# Altium PCB Nixie_clocks_Main_board.PcbDoc
Units mm, origin at the board's own origin, x right, y up, seen from the top; angles counter-clockwise.
Board outline 50 x 100 mm, 2 copper layers (Top Layer, Bottom Layer), stack 1.671 mm thick; 166 components, 129 nets, 456 pads, 71 vias.
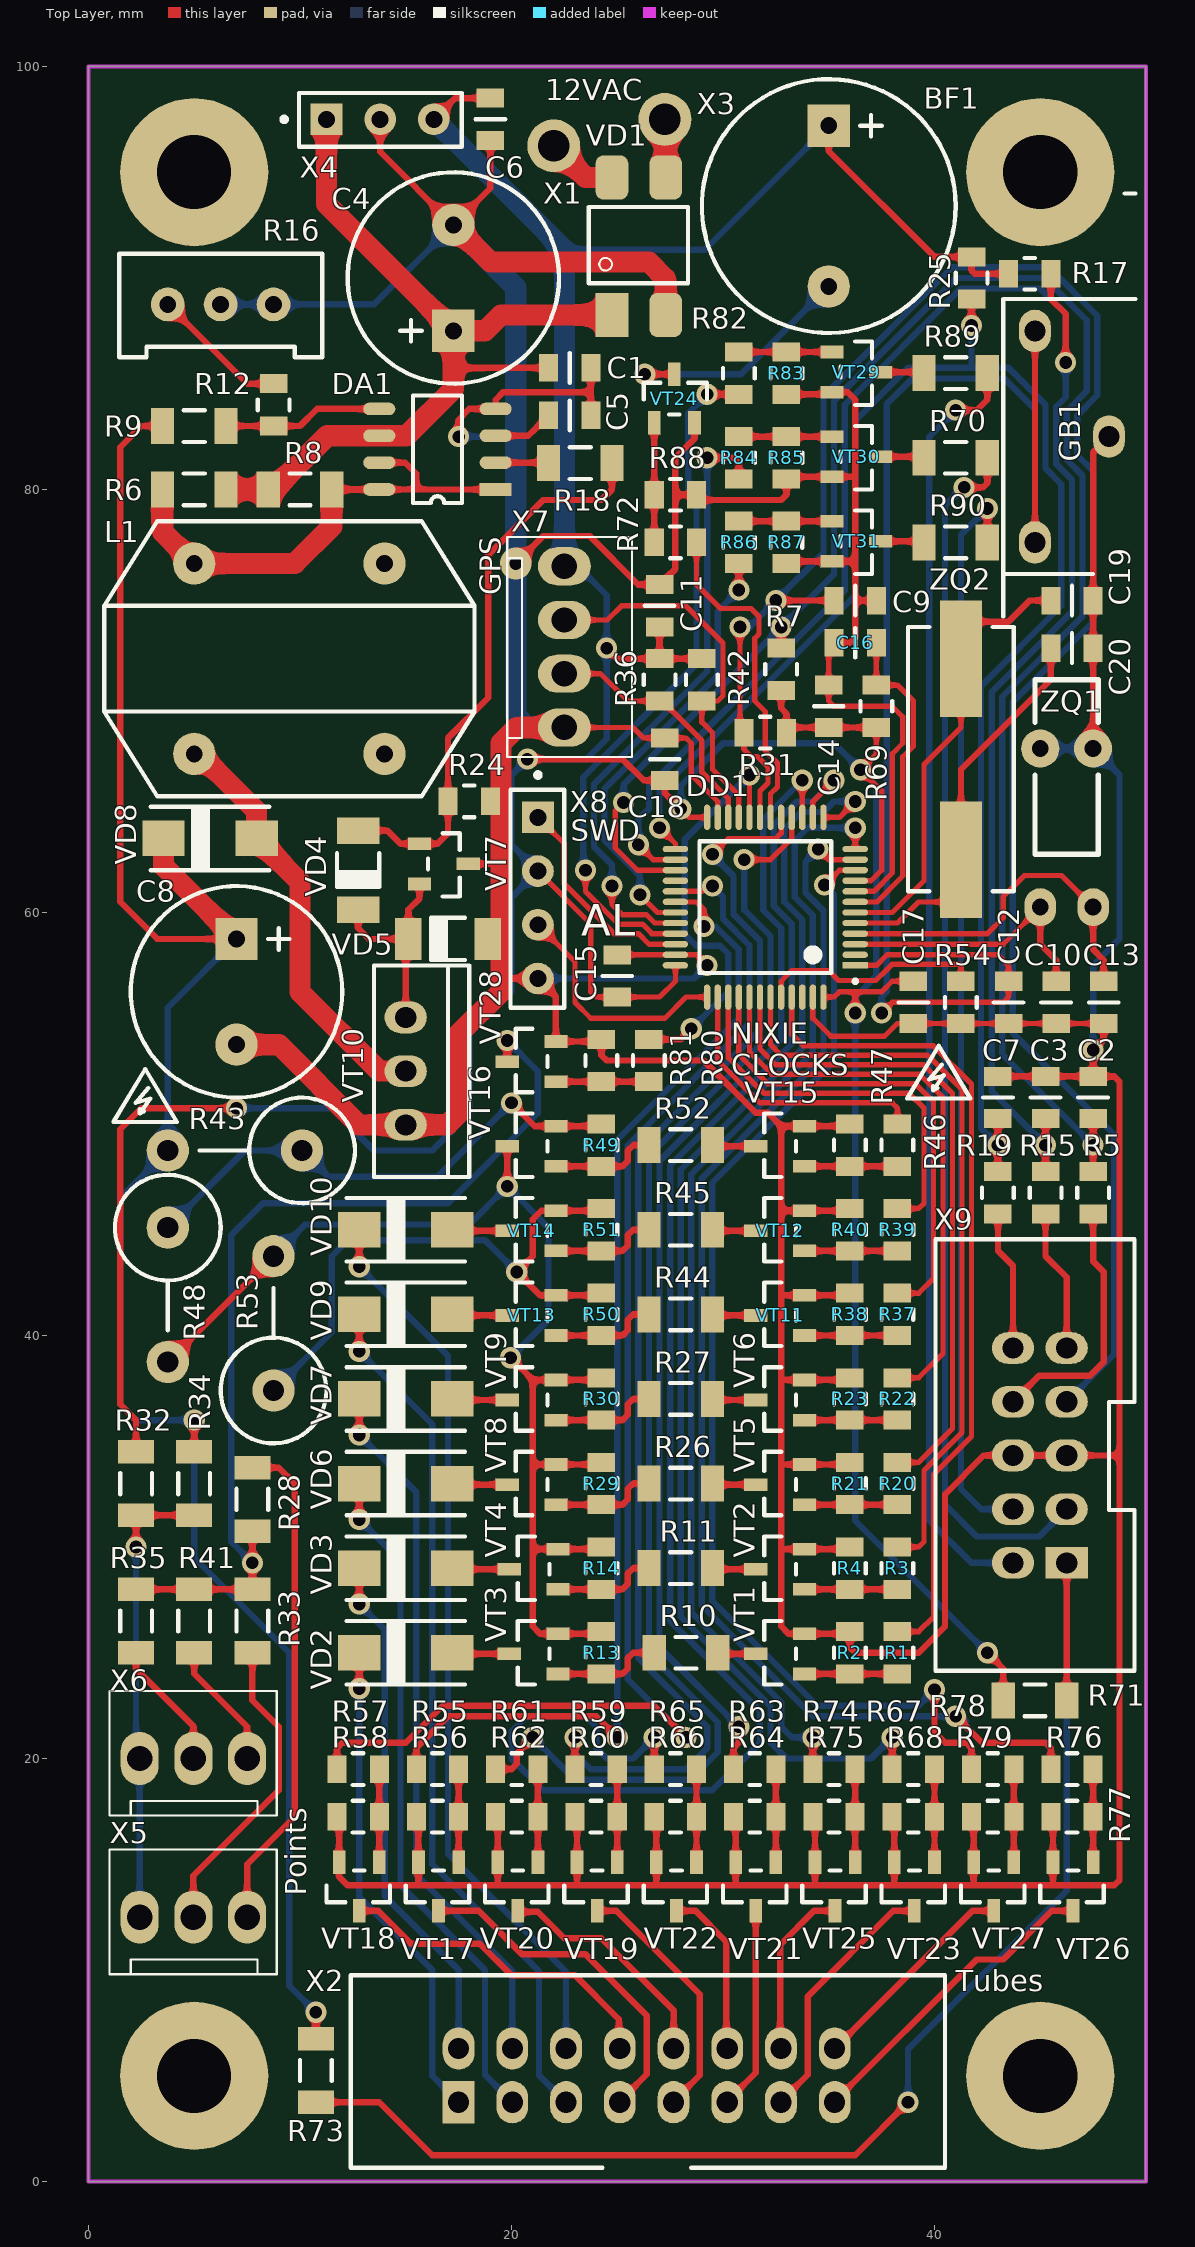
[diagram p0: Top Layer view]
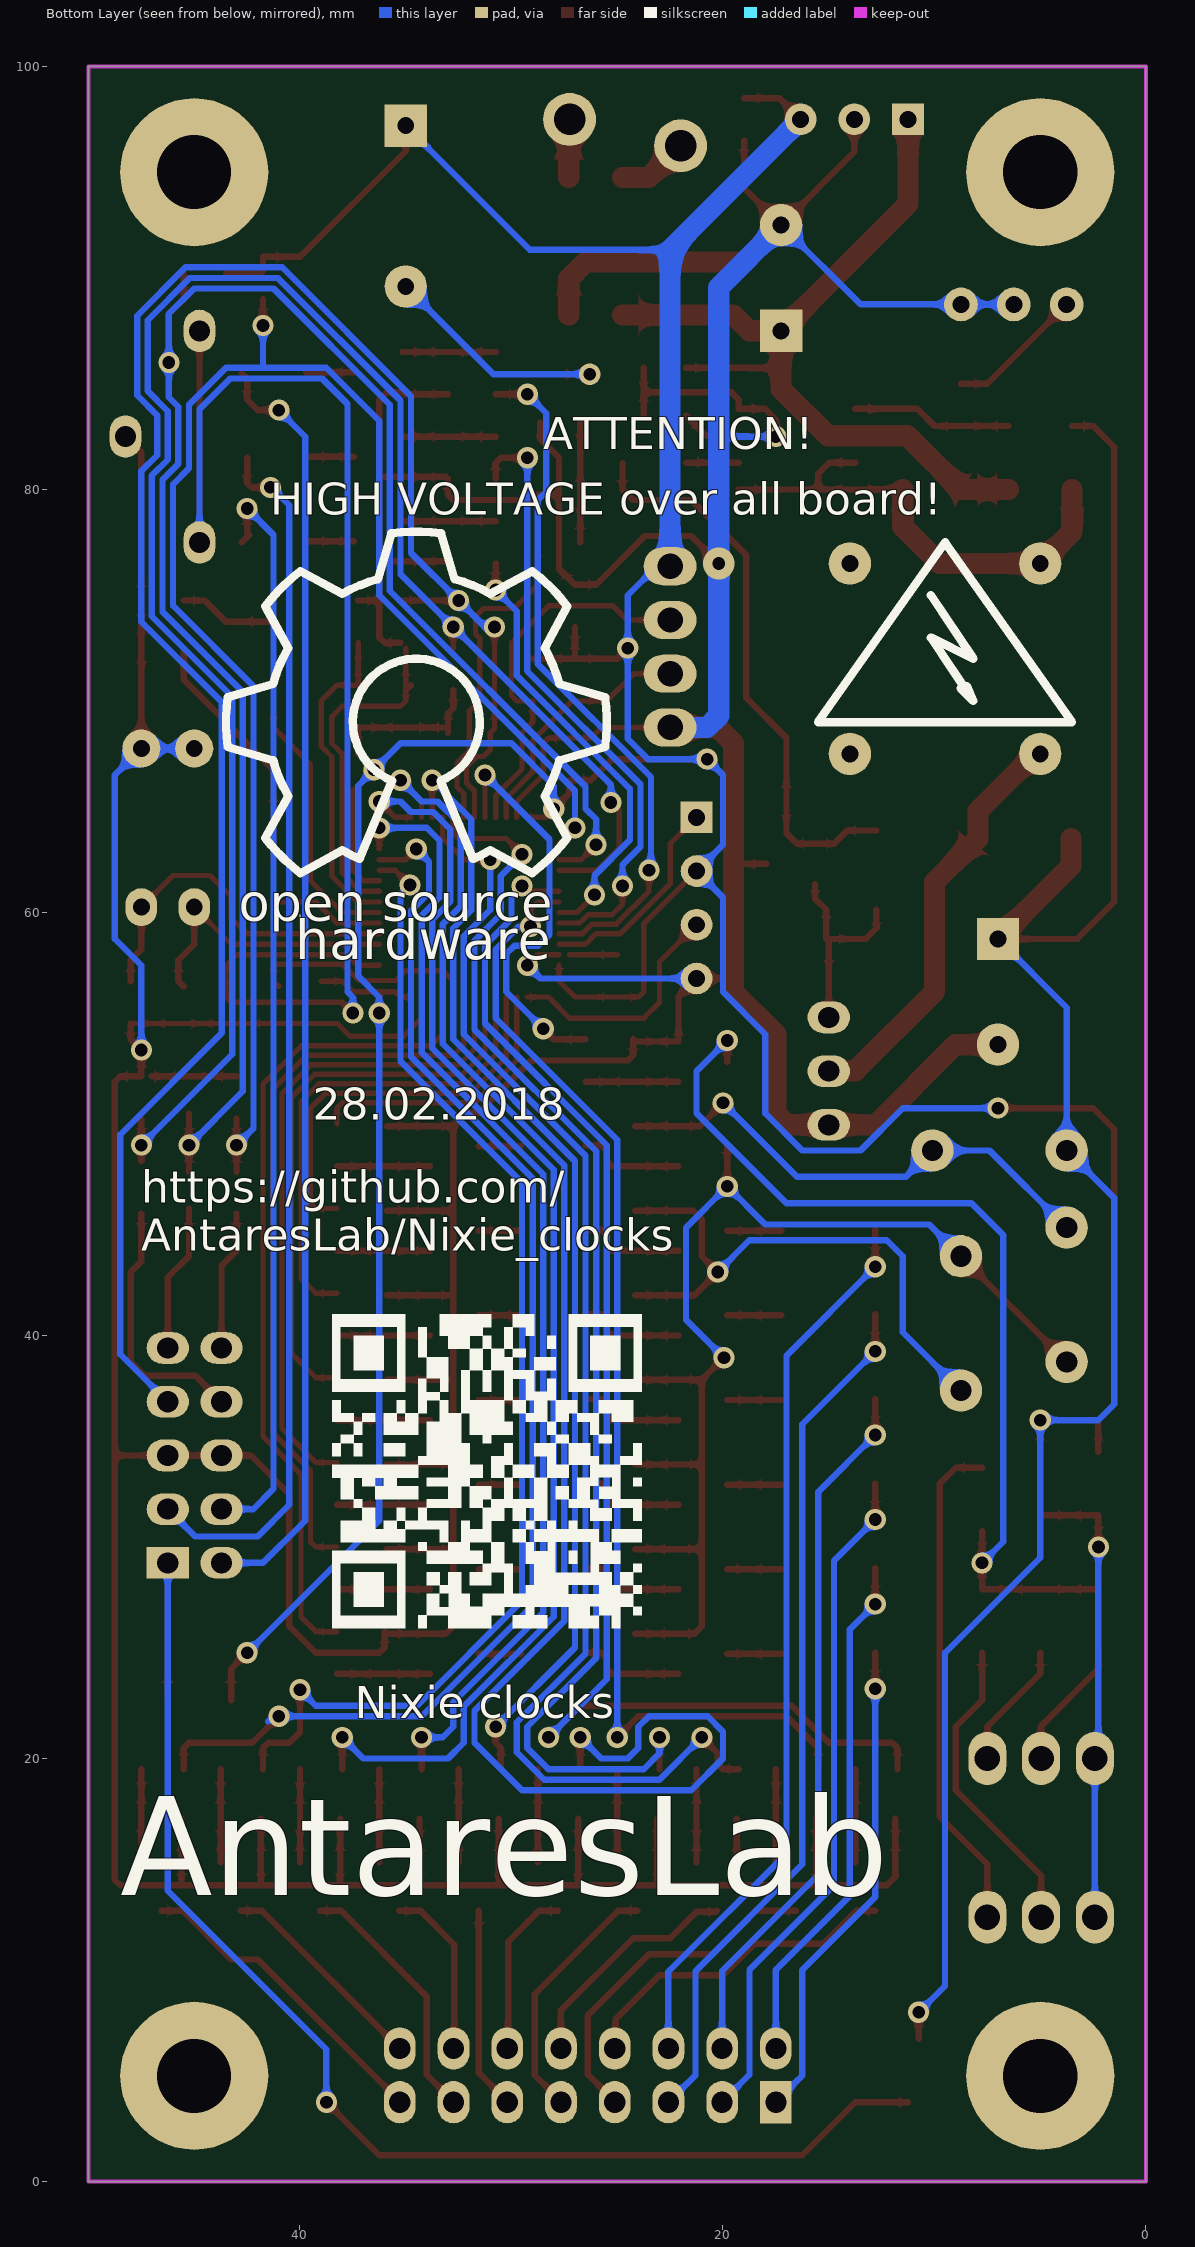
[diagram p1: Bottom Layer view, seen from below]

## Layer stack, top to bottom
Top Solder: solder mask 0.0102, Solder Resist, Dk 3.5
Top Layer: signal copper 0.0356
Dielectric 1: dielectric 1.6, FR-4, Dk 4.8
Bottom Layer: signal copper 0.0356
Bottom Solder: solder mask 0.0102, Solder Resist, Dk 3.5

## Board outline
0,0 50,0 50,100 0,100

## Design rules (kind name [scope] priority, off if disabled: settings)
Clearance [All] p1: gap=0.25 ignorepadtopadclearanceinfootprint=FALSE except(0: Arc-Hole Track-Hole SMDPad-Hole THPad-Hole Via-Hole Fill-Hole Poly-Hole Region-Hole Text-Hole; 0.2: Arc-Arc Arc-Track Arc-SMDPad Track-Track Track-SMDPad SMDPad-SMDPad)
PolygonConnect [All] p1: connectstyle=Relief reliefconductorwidth=0.254 reliefentries=4 polygonreliefangle="90 Angle" airgapwidth=0.254
RoutingVias [All] p1: holewidth=0.711 width=1.27 viastyle="Through Hole" minholewidth=0.711 minwidth=1.27 maxholewidth=0.711 maxwidth=1.27
SolderMaskExpansion [All] p1: expansion=0.102
Width [All] p1: maxlimit=5 minlimit=0.2 preferedwidth=0.254
30 further rules are at their usual default settings.

## Components (designator, comment, footprint, x,y, rotation, side; value= is the part's Value field where it differs from the comment)
BF1 "BMT-12xx" BMT-12xx 35,97.2 r270 top
C1 "100nF" C0805 22.75,85.75 r180 top
C2 "100nF" C0805 47.5,51.25 r270 top
C3 "100nF" C0805 45.25,51.25 r270 top
C4 "1000uF" "CapEl 10x20x5" 17.25,87.5 r90 top
C5 "1nF" C0805 22.75,83.5 r180 top
C6 "100nF" C0805 19,97.5 r90 top
C7 "100nF" C0805 43,51.25 r270 top
C8 "4.7uF" "CapEl 10x20x5" 7,58.75 r270 top
C9 "100nF" C0805 36.25,74.75 r180 top
C10 "22pF" C0805 45.75,55.75 r90 top
C11 "100nF" C0805 27,74.5 r270 top
C12 "100nF" C0805 43.5,55.75 r90 top
C13 "22pF" C0805 48,55.75 r90 top
C14 "100nF" C0805 35,69.75 r270 top
C15 "100nF" C0805 25,57 r270 top
C16 "100nF" C0805 36.25,72.75 r0 top
C17 "100nF" C0805 39,55.75 r90 top
C18 "100nF" C0805 27.25,67.25 r270 top
C19 "22pF" C0805 46.5,74.75 r180 top
C20 "22pF" C0805 46.5,72.5 r180 top
DA1 "MC34063ADG" SO8 19.25,80 r180 top
DD1 "STM32F103CBT6" LQFP48 36.25,57.5 r180 top
L1 "1mH" "CESL inductor" 9.5,72 r0 top
R1 "2.2k" R0805 38.25,25 r270 top
R2 "2.2k" R0805 36,25 r270 top
R3 "2.2k" R0805 38.25,29 r270 top
R4 "2.2k" R0805 36,29 r270 top
R5 "1k" R0805 47.5,46.75 r90 top
R6 "1.5" R1206 5,80 r180 top
R7 "10k" R0805 32.75,71.5 r270 top
R8 "1.5" R1206 10,80 r0 top
R9 "220k" R1206 5,83 r0 top
R10 "470k" R1206 28.25,25 r180 top
R11 "470k" R1206 28,29 r180 top
R12 "1k" R0805 8.75,84 r90 top
R13 "4.7k" R0805 24.25,25 r90 top
R14 "4.7k" R0805 24.25,29 r90 top
R15 "1k" R0805 45.25,46.75 r90 top
R16 "1k" 3296W 3.75,88.75 r0 top
R17 "10k" R0805 44.5,90.2 r180 top
R18 "10" R1206 23.25,81.25 r0 top
R19 "1k" R0805 43,46.75 r90 top
R20 "2.2k" R0805 38.25,33 r270 top
R21 "2.2k" R0805 36,33 r270 top
R22 "2.2k" R0805 38.25,37 r270 top
R23 "2.2k" R0805 36,37 r270 top
R24 "1k" R0805 18,65.25 r180 top
R25 "10k" R0805 41.75,90 r90 top
R26 "470k" R1206 28,33 r180 top
R27 "470k" R1206 28,37 r180 top
R28 "220k" R1206 7.75,32.25 r90 top
R29 "4.7k" R0805 24.25,33 r90 top
R30 "4.7k" R0805 24.25,37 r90 top
R31 "10k" R0805 32,68.5 r0 top
R32 "0R" R1206 2.25,33 r90 top
R33 "220k" R1206 7.75,26.5 r270 top
R34 "0R" R1206 5,33 r90 top
R35 "220k" R1206 2.25,26.5 r270 top
R36 "10k" R0805 27,71 r90 top
R37 "2.2k" R0805 38.25,41 r270 top
R38 "2.2k" R0805 36,41 r270 top
R39 "2.2k" R0805 38.25,45 r270 top
R40 "2.2k" R0805 36,45 r270 top
R41 "220k" R1206 5,26.5 r270 top
R42 "10k" R0805 29,71 r90 top
R43 "4.7k" "MF-1W Vertical" 3.75,48.75 r0 top
R44 "470k" R1206 28,41 r180 top
R45 "470k" R1206 28,45 r180 top
R46 "2.2k" R0805 38.25,49 r270 top
R47 "2.2k" R0805 36,49 r270 top
R48 "12k" "MF-1W Vertical" 3.75,38.75 r90 top
R49 "4.7k" R0805 24.25,49 r270 top
R50 "4.7k" R0805 24.25,41 r90 top
R51 "4.7k" R0805 24.25,45 r90 top
R52 "470k" R1206 28,49 r180 top
R53 "33k" "MF-1W Vertical" 8.75,43.75 r270 top
R54 "10k" R0805 41.25,55.75 r90 top
R55 "2.2k" R0805 16.5,19.5 r0 top
R56 "2.2k" R0805 16.5,17.25 r0 top
R57 "2.2k" R0805 12.75,19.5 r0 top
R58 "2.2k" R0805 12.75,17.25 r0 top
R59 "2.2k" R0805 24,19.5 r0 top
R60 "2.2k" R0805 24,17.25 r0 top
R61 "2.2k" R0805 20.25,19.5 r0 top
R62 "2.2k" R0805 20.25,17.25 r0 top
R63 "2.2k" R0805 31.5,19.5 r0 top
R64 "2.2k" R0805 31.5,17.25 r0 top
R65 "2.2k" R0805 27.75,19.5 r0 top
R66 "2.2k" R0805 27.75,17.25 r0 top
R67 "2.2k" R0805 39,19.5 r0 top
R68 "2.2k" R0805 39,17.25 r0 top
R69 "10k" R0805 37.25,69.75 r90 top
R70 "220k" R1206 41,81.5 r180 top
R71 "0R" R1206 44.75,22.75 r180 top
R72 "2.2k" R0805 27.75,77.5 r180 top
R73 "0R" R1206 10.75,5.25 r90 top
R74 "2.2k" R0805 35.25,19.5 r0 top
R75 "2.2k" R0805 35.25,17.25 r0 top
R76 "2.2k" R0805 46.5,19.5 r0 top
R77 "2.2k" R0805 46.5,17.25 r0 top
R78 "2.2k" R0805 42.75,19.5 r0 top
R79 "2.2k" R0805 42.75,17.25 r0 top
R80 "2.2k" R0805 26.5,53 r270 top
R81 "2.2k" R0805 24.25,53 r270 top
R82 "2.2k" R0805 30.75,85.5 r90 top
R83 "2.2k" R0805 33,85.5 r90 top
R84 "2.2k" R0805 30.75,81.5 r90 top
R85 "2.2k" R0805 33,81.5 r90 top
R86 "2.2k" R0805 30.75,77.5 r90 top
R87 "2.2k" R0805 33,77.5 r90 top
R88 "2.2k" R0805 27.75,79.75 r180 top
R89 "220k" R1206 41,85.5 r180 top
R90 "220k" R1206 41,77.5 r180 top
VD1 "MB10S" MBS 24.75,88.25 r90 top
VD2 "US1M" SMA 15,25 r180 top
VD3 "US1M" SMA 15,29 r180 top
VD4 "LL4148" SOD80 12.75,62 r270 top
VD5 "18V" SOD80 17,58.75 r180 top
VD6 "US1M" SMA 15,33 r180 top
VD7 "US1M" SMA 15,37 r180 top
VD8 "US1M" SMA 5.75,63.5 r180 top
VD9 "US1M" SMA 15,41 r180 top
VD10 "US1M" SMA 15,45 r180 top
VT1 "MMBTA42" SOT23-3 33.75,24 r180 top
VT2 "MMBTA42" SOT23-3 33.75,28 r180 top
VT3 "BF821" SOT23-3 22.1,24 r180 top
VT4 "BF821" SOT23-3 22.1,28 r180 top
VT5 "MMBTA42" SOT23-3 33.75,32 r180 top
VT6 "MMBTA42" SOT23-3 33.75,36 r180 top
VT7 "BC807" SOT23-3 15.75,63.25 r0 top
VT8 "BF821" SOT23-3 22,32 r180 top
VT9 "BF821" SOT23-3 22,36 r180 top
VT10 "BUZ90" TO220-3 15,52.5 r270 top
VT11 "MMBTA42" SOT23-3 33.75,40 r180 top
VT12 "MMBTA42" SOT23-3 33.75,44 r180 top
VT13 "BF821" SOT23-3 22,40 r180 top
VT14 "BF821" SOT23-3 22,44 r180 top
VT15 "MMBTA42" SOT23-3 33.75,48 r180 top
VT16 "BF821" SOT23-3 22,48 r180 top
VT17 "MMBTA42" SOT23-3 17.5,15 r270 top
VT18 "MMBTA42" SOT23-3 13.75,15 r270 top
VT19 "MMBTA42" SOT23-3 25,15 r270 top
VT20 "MMBTA42" SOT23-3 21.25,15 r270 top
VT21 "MMBTA42" SOT23-3 32.5,15 r270 top
VT22 "MMBTA42" SOT23-3 28.75,15 r270 top
VT23 "MMBTA42" SOT23-3 40,15 r270 top
VT24 "BC817" SOT23-3 26.75,83.25 r90 top
VT25 "MMBTA42" SOT23-3 36.25,15 r270 top
VT26 "MMBTA42" SOT23-3 47.5,15 r270 top
VT27 "MMBTA42" SOT23-3 43.75,15 r270 top
VT28 "MMBTA42" SOT23-3 22,52 r180 top
VT29 "MMBTA42" SOT23-3 35.25,86.5 r0 top
VT30 "MMBTA42" SOT23-3 35.25,82.5 r0 top
VT31 "MMBTA42" SOT23-3 35.25,78.5 r0 top
X1 "12VAC" Terminal_2,8 22,96.25 r270 top
X2 "Tubes" IDC16 17.5,3.75 r0 top
X3 "12VAC" Terminal_2,8 27.25,97.5 r180 top
X4 "DC-DC" PBS3 11.25,97.5 r0 top
X5 "Points 1" WF-3 7.5,12.5 r180 top
X6 "Points 2" WF-3 7.5,20 r180 top
X7 "GPS" WF-4 22.5,68.75 r90 top
X8 "SWD" PLS4 21.25,64.5 r270 top
X9 "Buttons" IDC10 46.25,29.25 r90 top
ZQ1 "32.768kHz" DT-38 46.25,60.25 r90 top
ZQ2 "8MHz" HC49SM 41.25,67.25 r270 top

## Footprints (in the part's own frame and the unit in brackets; to place one, negate y for a bottom-side part, rotate by r counter-clockwise, add the part's x,y. Pads: shape width x height; smd on the part's side, far side on the other; paste and mask are expansions set on the pad)
3296W [mm]
  round 1.6 hole 0.8: 1(0,0) 2(5,0) 3(2.5,0)
  silkscreen extent -2.3,-2.5 7.3,2.4, body extent -2.26,-2.4 7.27,2.4, height 11.55
BMT-12xx [mm]
  rect 2x2 hole 0.8: 1(0,0)
  round 2 hole 0.8: 2(7.6,0)
  silkscreen extent -2.2,-6 9.8,6, body extent -2.25,-6 9.75,6, height 9.5
C0805 [mm]
  rect 0.9x1.3 smd: 1(-1,0) 2(1,0)
  silkscreen extent 0,-0.7 0,0.7, body extent -1,-0.63 1,0.63, height 0.8
"CapEl 10x20x5" [mm]
  rect 2x2 hole 0.8: 1(0,0)
  round 2 hole 0.8: 2(5,0)
  silkscreen extent -2.5,-5 7.5,5, body extent -2.58,-5.08 7.58,5.08, height 20.42
"CESL inductor" [mm]
  round 2 hole 0.8: 1(-4.5,-4.5) 2(4.5,-4.5) 3(4.5,4.5) 4(-4.5,4.5)
  silkscreen extent -8.75,-6.5 8.75,6.5, body extent -8.5,-6.5 8.5,6.5, height 15
DT-38 [mm]
  oval 1.8x1.5 hole 0.8: 1(0,1.25) 2(0,-1.25)
  round 1.8 hole 0.8: 3(7.5,-1.25) 3(7.5,1.25)
  silkscreen extent 2.5,-1.5 10.75,1.5, body extent -0.22,-1.5 10.8,1.5, height 3
HC49SM [mm]
  rect 5.5x2 smd: 1(-4.75,0) 2(4.75,0)
  silkscreen extent -6.25,-2.5 6.25,2.5, body extent -6.28,-2.4 6.22,2.4, height 3.92
IDC10 [mm]
  rect 1.5x2 hole 1: 1(0,0)
  oval 1.5x2 hole 1: 2(0,2.54) 3(2.54,0) 4(2.54,2.54) 5(5.08,0) 6(5.08,2.54) 7(7.62,0) 8(7.62,2.54) 9(10.16,0) 10(10.16,2.54)
  silkscreen extent -5.1,-3.2 15.3,6.2, body extent -5.05,-3.1 15.25,6, height 9.3
IDC16 [mm]
  rect 1.5x2 hole 1: 1(0,0)
  oval 1.5x2 hole 1: 2(0,2.54) 3(2.54,0) 4(2.54,2.54) 5(5.08,0) 6(5.08,2.54) 7(7.62,0) 8(7.62,2.54) 9(10.16,0) 10(10.16,2.54) 11(12.7,0) 12(12.7,2.54) 13(15.24,0) 14(15.24,2.54) 15(17.78,0) 16(17.78,2.54)
  silkscreen extent -5.1,-3.1 23,6, body extent -5.1,-3.1 22.9,6, height 9.3
LQFP48 [mm]
  rect 1.2x0.3 smd mask+0.05: 1(0,0)
  oval 1.2x0.3 smd mask+0.05: 2(0,-0.5) 3(0,-1) 4(0,-1.5) 5(0,-2) 6(0,-2.5) 7(0,-3) 8(0,-3.5) 9(0,-4) 10(0,-4.5) 11(0,-5) 12(0,-5.5) 25(8.5,-5.5) 26(8.5,-5) 27(8.5,-4.5) 28(8.5,-4) 29(8.5,-3.5) 30(8.5,-3) 31(8.5,-2.5) 32(8.5,-2) 33(8.5,-1.5) 34(8.5,-1) 35(8.5,-0.5) 36(8.5,0)
  oval 0.3x1.2 smd mask+0.05: 13(1.5,-7) 14(2,-7) 15(2.5,-7) 16(3,-7) 17(3.5,-7) 18(4,-7) 19(4.5,-7) 20(5,-7) 21(5.5,-7) 22(6,-7) 23(6.5,-7) 24(7,-7) 37(7,1.5) 38(6.5,1.5) 39(6,1.5) 40(5.5,1.5) 41(5,1.5) 42(4.5,1.5) 43(4,1.5) 44(3.5,1.5) 45(3,1.5) 46(2.5,1.5) 47(2,1.5) 48(1.5,1.5)
  silkscreen extent -0.05,-5.86 7.36,0.8, body extent -0.25,-7.25 8.75,1.75, height 1.6
MBS [mm]
  rect 2.1x1.55 smd: 1(0,0)
  rrect50% 2.1x1.55 smd: 2(6.5,0) 3(6.5,-2.54) 4(0,-2.54)
  silkscreen extent 1.5,-3.6 5.1,1.1, body extent 0,-3.55 6.5,1.15, height 3.1
"MF-1W Vertical" [mm]
  round 2 hole 1: 1(0,0) 2(6.35,0)
  silkscreen extent 1.5,-2.5 8.85,2.5, body extent -0.32,-2.25 8.67,2.25, height 15.15
PBS3 [mm]
  rect 1.5x1.5 hole 0.8: 1(0,0)
  round 1.5 hole 0.8: 2(2.54,0) 3(5.08,0)
  silkscreen extent -2.1,-1.3 6.4,1.25, body extent -1.27,-1.27 6.35,1.27, height 8.4
PLS4 [mm]
  rect 1.5x1.5 hole 0.8: 1(0,0)
  round 1.5 hole 0.8: 2(2.54,0) 3(5.08,0) 4(7.62,0)
  silkscreen extent -2.1,-1.3 9,1.25, body extent -1.27,-1.27 8.89,1.27, height 8.44
R0805 [mm]
  rect 0.9x1.3 smd: 1(-1,0) 2(1,0)
  silkscreen extent -0.25,-0.75 0.25,0.75, body extent -1,-0.62 1,0.63, height 0.5
R1206 [mm]
  rect 1.1x1.7 smd: 1(-1.5,0) 2(1.5,0)
  silkscreen extent -0.5,-0.75 0.5,0.75, body extent -1.55,-0.8 1.55,0.8, height 0.55
SMA [mm]
  rect 2x1.68 smd: 1(-2.2,0) 2(2.2,0)
  silkscreen extent -2.8,-1.5 2.8,1.5, body extent -2.8,-1.47 2.8,1.48, height 2.7
SO8 [mm]
  rect 1.52x0.6 smd: 1(0,0)
  oval 1.52x0.6 smd: 2(0,-1.27) 3(0,-2.54) 4(0,-3.81) 5(5.5,-3.81) 6(5.5,-2.54) 7(5.5,-1.27) 8(5.5,0)
  silkscreen extent 1.59,-4.44 3.91,0.64, body extent -0.25,-4.33 5.74,0.57, height 1.6
SOD80 [mm]
  rect 1.25x2 smd: 1(-1.875,0) 2(1.875,0)
  silkscreen extent -0.8,-1.1 0.8,1, body extent -1.68,-0.8 1.68,0.74, height 1.52
SOT23-3 [mm]
  rect 1.1x0.6 smd: 1(-0.1,0) 2(-0.1,-1.9) 3(2.2,-0.95)
  silkscreen extent 0.3,-2.5 1.8,0.5, body extent -0.2,-2.5 2.3,0.5, height 1.1
Terminal_2,8 [mm]
  round 2.5 hole 1.5: 1(0,0)
  body extent -2,-0.25 2,0.25, height 9
TO220-3 [mm]
  oval 1.5x2 hole 1: 1(-2.54,0) 2(0,0) 3(2.54,0)
  silkscreen extent -5,-1.5 5,3, body extent -5.08,-1.4 5.08,3.18, height 18.54
WF-3 [mm]
  oval 1.8x2.5 hole 1.2: 1(5.08,0) 2(2.54,0) 3(0,0)
  silkscreen extent -1.4,-3.2 6.5,2.7, body extent -1.36,-3.2 6.44,2.7, height 11.73
WF-4 [mm]
  oval 1.8x2.5 hole 1.2: 1(7.62,0) 2(5.08,0) 3(2.54,0) 4(0,0)
  silkscreen extent -1.4,-3.2 9,2.7, body extent -1.28,-3.2 8.88,2.7, height 11.73

## Part data
BF1: "Magnetic transducer"
C1 C2 C3 C5 C6 C7 C9 C10 C11 C12 C13 C14 C15 C16 C17 C18 C19 C20: library part C0805, "0805 SMD capacitors"
C4 C8: library part CapEL_10x20x5, "Electrolytic capacitor"
DA1: "1.5A, Step-Up/Down/Inverting Switching Regulator"
DD1: "ARM Cortex-M3 MCU with 128kB Flash, USB, CAN, etc."
L1: library part "CESL inductor 1", "Compact energy-saving lamp inductor"
R1 R2 R3 R4 R5 R7 R12 R13 R14 R15 R17 R19 R20 R21 R22 R23 R24 R25 R29 R30 R31 R36 R37 R38 R39 R40 R42 R46 R47 R49 R50 R51 R54 R55 R56 R57 R58 R59 R60 R61 R62 R63 R64 R65 R66 R67 R68 R69 R72 R74 R75 R76 R77 R78 R79 R80 R81 R82 R83 R84 R85 R86 R87 R88: library part R0805, "0805 SMD 1/8W resistor"
R6 R8 R9 R10 R11 R18 R26 R27 R28 R32 R33 R34 R35 R41 R44 R45 R52 R70 R71 R73 R89 R90: library part R1206, "1206 SMD 1/4W resistor"
R16: library part 3296W, "Multiturn Trimmer Resistor"
R43 R48 R53: library part MF-1WV, "1W THT Resistor (Vertical mounting)"
VD1: "Single-Phase Silicon Bridge Rectifier"
VD2 VD3 VD6 VD7 VD8 VD9 VD10: "Surface Mount Ultrafast Rectifier"
VD4: "75V 150mA Small Signal Fast Switching Diode"
VD5: library part BZV55, "500mW SMD Zener Diode"
VT1 VT2 VT5 VT6 VT11 VT12 VT15 VT17 VT18 VT19 VT20 VT21 VT22 VT23 VT25 VT26 VT27 VT28 VT29 VT30 VT31: "300V 500mA SOT23-3 SMD NPN transistor with h21>25"
VT3 VT4 VT8 VT9 VT13 VT14 VT16: "300V 50mA SOT23-3 SMD PNP transistor with h21>50"
VT7: "45V 500mA SOT23-3 SMD PNP transistor with h21>100"
VT10: "600V 4.5A TO220-3 THT n-MOSFET transistor"
VT24: "45V 500mA SOT23-3 SMD NPN transistor with h21>100"
X1 X3: library part Term_2.8, "Terminal"
X2: library part IDC-16, "PCB Connector"
X4: library part PBS-3, "PCB Connector"
X5 X6: library part WF-3, "PCB Connector"
X7: library part WF-4, "PCB Connector"
X8: "4 pin SWD connector for ARM MCU programming"
X9: library part IDC-10, "PCB Connector"
ZQ1: library part DT-38, "RTC THT Quartz Resonator"
ZQ2: library part HC49SM, "Standard SMD Quartz Resonator"

## Free pads (board coordinates)
  round 7 hole 3.5: 0(5,5) 0(5,95) 0(45,5) 0(45,95)
  oval 1.5x2 hole 1: 1(44.75,77.5) 1(44.75,87.5) 2(48.25,82.5)

## Via types
v1: diameter 1, hole 0.6, Top Layer to Bottom Layer, tented both sides, 70 vias
v2: diameter 1.5, hole 0.6, Top Layer to Bottom Layer, tented both sides, 1 vias

## Nets (pads, with @x,y where several pads share a name; then routed paths per layer and width w, separated by ;. In a path a pad name is that pad's centre, name@x,y a point inside that pad or via, vN(x,y) a via of type N, cw(c..) or ccw(c..) an arc to the next point about the centre after c; other vN are vias at no path point)
+3.3V: BF1.1 C6.2 C11.2 C14.2 C15.2 C17.2 C18.2 DD1.9 DD1.24 DD1.36 DD1.48 R7.2 R17.2 R25.2 R31.2 R32.2 R36.2 R42.2 R69.1 R71.2 X4.3 X7.1 X8.2 | length 227.9
  Top Layer w0.25: X8.2 23.75,59.46 23.75,56.25 24,56 C15.2 27,56 27.75,56.75 DD1.36 ; v1(28,64.9) 28.4,64.5 DD1.24 ; DD1.48 35.25,56 35.5,56.25 36.25,56.25 ; v1(36.25,55.25) 36.25,56.25 ; DD1.9 37,61.5 37.5,62 37.5,65.75 v1(36.5,66.75) 37.25,67.5 R69.1 ; C17.2 38,56.75 37.5,56.25 36.25,56.25
  Top Layer w0.3: R32.2 2.25,36 1.5,36.75 1.5,49.75 2.5,50.75 v1(7,50.75) ; X4.3 17.33,98.5 C6.2 ; v1(20.75,67.25) 25.25,67.25 26.25,66.25 C18.2 27.25,65.65 v1(28,64.9) ; v1(24.5,72.5) 25,72 R36.2 ; C11.2 R36.2 ; R42.2 R36.2 ; R7.2 32.75,69.65 33,69.4 R31.2 ; R31.2@33.25,68.75 C14.2 R69.1 ; BF1.1 35,96 40,91 R25.2 41.75,90.35 41.9,90.2 R17.2 ; v1(42.5,25) 43.25,24.25 R71.2
  Bottom Layer w0.3: v1(7,50.75) 11.5,50.75 13.5,48.75 16.25,48.75 18,50.5 18,54.25 20,56.25 20,60.71 X8.2 20,63.21 20,66.5 v1(20.75,67.25) 23.543,67.25 24.5,68.207 v1(24.5,72.5) 24.5,75 23.13,76.37 X7.1 ; 22.5,91.33 29.13,91.33 BF1.1 ; v1(28,64.9) 28,66 30,68 35.25,68 v1(36.5,66.75) 37.25,66 37.25,57 36.25,56 v1(36.25,55.25) 36.25,31.25 v1(42.5,25)
  Bottom Layer w1: X4.3 22.5,91.33 X7.1
+12V: C1.2 C4.1 DA1.6 R6.1 R8.1 VD1.1 X4.1 | length 40.3
  Top Layer w0.3: 17.2,85.75 17.25,85.75 C1.2
  Top Layer w1: R6.1 R8.1 8.75,80 11.29,82.54 DA1.6 15.04,82.54 17.25,84.75 17.25,85.75 C4.1 ; X4.1 11.25,93.5 C4.1 ; VD1.1 19.5,88.25 18.75,87.5 C4.1
+200V: C8.1 R9.1 R34.2 R43.1 R73.2 VD8.2 | length 97.5
  Top Layer w0.3: R9.1 2.5,83 1.5,82 1.5,60.5 3.25,58.75 C8.1 ; R34.2 v1(5,36) ; R73.2 v1(10.75,8)
  Top Layer w1: VD8.2 3.55,62.2 C8.1
  Bottom Layer w0.3: C8.1 3.75,55.5 R43.1 1.5,46.5 1.5,36.75 2.25,36 v1(5,36) 5,29.5 9.5,25 9.5,9.25 v1(10.75,8)
A1: DD1.45 R1.1 | length 39.2
  Top Layer w0.25: DD1.45 33.25,54.25 33.8,53.7 39.936,53.7 41.75,51.886 41.75,35.227 39.95,33.427 39.95,26.7 39.25,26 R1.1
A2: DD1.43 R3.1 | length 35.7
  Top Layer w0.25: DD1.43 32.25,53.75 32.75,53.25 39.673,53.25 39.711,53.211 41.3,51.623 41.3,35.414 39.5,33.614 39.5,30.25 39.25,30 R3.1
A3: DD1.42 R20.1 | length 31.5
  Top Layer w0.25: DD1.42 31.75,53.546 32.496,52.8 39.486,52.8 40.85,51.436 40.85,35.6 39.25,34 R20.1
A4: DD1.41 R22.1 | length 27.4
  Top Layer w0.25: DD1.41 31.25,53.409 32.309,52.35 39.3,52.35 40.4,51.25 40.4,39.15 39.25,38 R22.1
A5: DD1.40 R37.1 | length 23.2
  Top Layer w0.25: DD1.40 30.75,53.273 32.123,51.9 39.1,51.9 39.95,51.05 39.95,42.7 39.25,42 R37.1
A6: DD1.39 R39.1 | length 19
  Top Layer w0.25: DD1.39 30.25,53.136 31.936,51.45 38.8,51.45 39.5,50.75 39.5,46.25 39.25,46 R39.1
Btn: C7.2 DD1.25 R19.2 R25.1 | length 78.5
  Top Layer w0.25: v1(27,64) 27.75,63.25 DD1.25
  Top Layer w0.3: v1(41.75,87.75) R25.1 ; R19.2 v1(43,49) C7.2
  Bottom Layer w0.3: v1@27,63.65 27,65.75 36.25,75 36.25,83.25 38.75,85.75 41.75,85.75 ; v1(41.75,87.75) 41.75,85.75 ; v1(43,49) 42.2,49.8 42.2,70.7 46,74.5 46,80.25 45.25,81 45.25,84 43.5,85.75 41.75,85.75
Btn_btn: R19.1 X9.10 | length 6.6
  Top Layer w0.3: R19.1 43,44 43.71,43.29 X9.10
Buzzer: DD1.18 R72.1 | length 15.7
  Top Layer w0.25: R72.1 28.75,75.5 29.875,74.375 31.325,74.375 31.7,74 31.7,73.163 31.5,72.963 31.5,70 32,69.5 32,67.636 32.575,67.061 32.575,65.939 32.25,65.614 DD1.18
C0: DD1.30 R55.1 | length 55.6
  Top Layer w0.25: DD1.30 28.75,60.5 29.1,60.15 v1(29.1,59.334)
  Top Layer w0.3: R55.1 15.5,20.5 17,22 24,22 v1(25,21)
  Bottom Layer w0.3: v1(25,21) 25,49.25 30.75,55 30.75,58.25 29.666,59.334 v1(29.1,59.334)
C1: DD1.29 R57.1 | length 65.3
  Top Layer w0.25: DD1.29 29,61 29.25,61.25 v1(29.5,61.25)
  Top Layer w0.3: R57.1 11.75,20.5 12,20.75 15,20.75 16.75,22.5 26.75,22.5 v1(28.25,21)
  Bottom Layer w0.3: v1(28.25,21) 25.5,23.75 25.5,49 31.25,54.75 31.25,58.457 30,59.707 30,60.75 v1(29.5,61.25)
C2: DD1.17 R59.1 | length 60.5
  Top Layer w0.25: v1(29.5,62.75) 30.25,63.5 32.5,63.5 32.75,63.75 DD1.17
  Top Layer w0.3: R59.1 v1(23,21)
  Bottom Layer w0.3: v1(23,21) 23,20.25 23.75,19.5 28.25,19.5 29.25,20.5 29.25,21.5 26,24.75 26,48.707 31.75,54.457 31.75,58.664 30.5,59.914 30.5,61.727 29.5,62.727 v1(29.5,62.75)
C3: DD1.16 R61.1 | length 62.9
  Top Layer w0.25: v1(31,62.5) 32.25,62.5 33.25,63.5 DD1.16
  Top Layer w0.3: R61.1 20,19.5 20.25,19.75 20.25,20.25 v1(21,21)
  Bottom Layer w0.3: v1(21,21) 23,19 28.457,19 29.75,20.293 29.75,21.707 26.5,24.957 26.5,48.5 32.25,54.25 32.25,58.871 31,60.121 v1(31,62.5)
C4: DD1.15 R63.1 | length 53.7
  Top Layer w0.25: DD1.15 v1(33.75,66.25)
  Top Layer w0.3: R63.1 30.5,20.5 30.75,20.75 v1(30.75,21.5)
  Bottom Layer w0.3: v1(30.75,21.5) 27,25.25 27,48.25 32.75,54 32.75,59.249 31.9,60.099 31.9,64.4 v1(33.75,66.25)
C5: DD1.14 R65.1 | length 78.7
  Top Layer w0.25: DD1.14 34.25,65.25 v1(35.25,66.25)
  Top Layer w0.3: R65.1 v1(26.75,21)
  Bottom Layer w0.3: v1(26.75,21) 25.75,20 24.5,20 24,20.5 24,21.5 23.5,22 20.727,22 20,21.273 20,20 21.5,18.5 29.5,18.5 31.75,20.75 31.75,22.25 27.5,26.5 27.5,48.043 33.25,53.793 33.25,59.456 32.4,60.306 32.4,64.15 33.5,65.25 34.25,65.25 v1(35.25,66.25)
C6: DD1.13 R67.1 | length 61.4
  Top Layer w0.25: DD1.13 35.5,64.5 v1(36.25,65.25)
  Top Layer w0.3: R67.1 v1(38,21)
  Bottom Layer w0.3: v1(36.25,65.25) 35.25,65.25 34.75,64.75 33.707,64.75 32.9,63.943 32.9,60.513 33.75,59.663 33.75,53.586 28,47.836 28,26.707 32.25,22.457 32.25,20.75 33,20 37,20 v1(38,21)
C7: DD1.12 R74.1 | length 53.7
  Top Layer w0.25: DD1.12 v1(36.25,64)
  Top Layer w0.3: R74.1 v1(34.25,21)
  Bottom Layer w0.3: v1(34.25,21) 33.25,21 32.75,21.5 32.75,22.664 28.5,26.914 28.5,47.629 34.25,53.379 34.25,59.87 33.4,60.72 33.4,63.4 34,64 v1(36.25,64)
C8: DD1.11 R76.1 | length 61.6
  Top Layer w0.25: v1(34.5,63) 35,62.5 DD1.11
  Top Layer w0.3: v1(41,22) 42.25,20.75 45.25,20.75 45.5,20.5 R76.1
  Bottom Layer w0.3: v1(34.5,63) 33.9,62.4 33.9,60.927 34.75,60.077 34.75,53.172 29,47.422 29,27.25 34.25,22 v1(41,22) 41.25,22 41.5,21.75
C9: DD1.10 R78.1 | length 56.1
  Top Layer w0.25: v1(34.8,61.3) 35.5,62 DD1.10
  Top Layer w0.3: v1(40,23.25) 40,21.25 40.5,20.75 41.5,20.75 41.75,20.5 R78.1
  Bottom Layer w0.3: v1(34.8,61.3) 35.25,60.85 35.25,52.964 29.5,47.214 29.5,27.457 34.457,22.5 39.25,22.5 v1(40,23.25)
GND: C1.1 C2.1 C3.1 C4.2 C5.1 C6.1 C7.1 C8.2 C9.1 C10.1 C11.1 C12.1 C13.1 C14.1 C15.1 C16.1 C17.1 C18.1 C19.1 C20.1 DA1.4 DD1.8 DD1.23 DD1.35 DD1.47 pad.2 R2.1 R4.1 R16.2 R16.3 R21.1 R23.1 R24.1 R38.1 R40.1 R47.1 R54.1 R56.1 R58.1 R60.1 R62.1 R64.1 R66.1 R68.1 R75.1 R77.1 R79.1 R81.1 R83.1 R85.1 R87.1 R88.1 VD1.4 VD5.1 VT1.2 VT2.2 VT5.2 VT6.2 VT7.3 VT10.3 VT11.2 VT12.2 VT15.2 VT17.2 VT18.2 VT19.2 VT20.2 VT21.2 VT22.2 VT23.2 VT24.2 VT25.2 VT26.2 VT27.2 VT28.2 VT29.2 VT30.2 VT31.2 X4.2 X7.4 X8.4 X9.5 X9.6 ZQ1.3 | length 441.8
  Top Layer w0.25: X7.4 25.75,68.75 26.25,68.25 C18.1 28.25,68.25 28.5,68 28.5,66.5 29.75,65.25 DD1.23 ; C15.1 DD1.35@27.25,58 ; DD1.35 28.75,58 v1(29.25,57.5) ; DD1.47 34.25,55 35.1,54.15 37.637,54.15 38.237,54.75 C17.1 R54.1 C12.1 C10.1 C13.1 ; C16.1@35,72.5 C14.1 35,70.5 35,70 35.25,69.75 38,69.75 38.5,69.25 38.5,68 38,67.5 38,61.864 37.136,61 DD1.8 DD1.8@36.275,61.025
  Top Layer w0.3: R58.1@11.85,17.15 VT18.2 11.85,14.4 12.25,14 48.5,14 48.75,14.25 48.75,34.33 ; X4.2 13.79,95.96 C4.2 19,94.25 C6.1 ; 15.6,14.1 VT17.2 R56.1@15.6,17.15 ; v1(17.5,82.5) 17.5,83.3 18.01,83.81 DA1.4 19.25,84.25 19.6,84.6 23.75,84.6 ; VT7.3 19.45,62.3 ; 19.35,14.1 VT20.2 R62.1@19.35,17.15 ; 19.62,56.88 X8.4 22.1,56.03 VT28.2 R81.1@24.15,53.9 ; v2(20.2,76.5) 21.5,77.8 23.7,77.8 26,75.5 C11.1 27.75,76.25 27.75,79.75 ; 23.1,14.1 VT19.2 R60.1@23.1,17.15 ; C5.1 23.75,84.6 ; C1.1 23.75,84.6 ; R81.1 24.25,53.25 24.5,53 29.078,53 31.553,50.525 32.125,50.525 32.75,49.9 ; 26.85,14.1 VT22.2 R66.1@26.85,17.15 ; VT24.2 28.65,82.4 27.75,81.5 27.75,79.75 ; R88.1 27.75,79.75 ; R88.1@29,79.5 32.75,79.5 33,79.75 R85.1 ; 30.6,14.1 VT21.2 R64.1@30.6,17.15 ; 32.85,29.9 VT2.2 R4.1@35.9,29.9 ; 32.85,33.9 VT5.2 R21.1@35.9,33.9 ; 32.85,37.9 VT6.2 R23.1@35.9,37.9 ; 32.9,41.9 VT11.2 R38.1@35.9,41.9 ; R83.1 VT29.2@35.05,84.5 ; R87.1@33.1,76.6 VT31.2 36.25,76.6 ; R85.1@33.1,80.6 VT30.2 36.225,80.6 ; 34.35,14.1 VT25.2 R75.1@34.35,17.15 ; C14.1@34.75,70.75 C14.1@35,70.5 ; VT29.2 35.9,84.6 36.25,84.25 36.25,76.6 ; C16.1 36,72.75 36.25,73 36.25,74.75 ; R2.1@35.9,25.9 VT1.2 33.1,25.9 32.75,26.25 32.75,45.9 ; R40.1@35.9,45.9 VT12.2 32.75,45.9 ; R47.1@35.9,49.9 VT15.2 32.75,49.9 ; R2.1 36,25.25 36.25,25 39.25,25 40.5,26.25 40.5,32.5 42.33,34.33 X9.6 48.75,34.33 ; C9.1 36.25,74.75 ; 38.1,14.1 VT23.2 R68.1@38.1,17.15 ; 41.85,14.1 VT27.2 R79.1@41.85,17.15 ; C7.1 C3.1 C2.1@47,52.25 ; 45.6,14.1 VT26.2 R77.1@45.6,17.15 ; ZQ1.3@47.5,67.5 C20.1 C19.1 47.5,81.75 pad.2 ; C13.1 48,54 v1(47.5,53.5) C2.1 48.5,52.25 48.75,52 48.75,34.33 ; 32.75,45.9 32.75,49.9 ; 36.25,74.75 36.25,76.6
  Top Layer w1: C8.2 9,53.75 12.79,49.96 VT10.3 16.96,49.96 17.5,50.5 17.5,54.25 19.5,56.25 19.5,68 20.25,68.75 X7.4 ; C4.2 19,90.75 26.5,90.75 27.29,89.96 VD1.4
  Bottom Layer w0.3: R16.3 R16.2 13.5,88.75 C4.2 ; v1(17.5,82.5) 20.2,82.5 ; X8.4 28.63,56.88 v1(29.25,57.5) ; ZQ1.3@45,67.75 47.5,67.75 48.75,66.5 48.75,58.75 47.5,57.5 v1(47.5,53.5)
  Bottom Layer w1: C4.2 20.2,89.55 20.2,82.5 v2(20.2,76.5) 20.2,69.3 20.75,68.75 X7.4
HV1: R13.2 R14.2 R29.2 R30.2 R48.1 R53.1 VT3.2 VT4.2 VT8.2 VT9.2 VT16.3 | length 56.9
  Top Layer w0.3: R48.1 R53.1 ; v1(19.8,47.05) VT16.3 ; v1(19.95,38.95) 21,37.9 ; R13.2@24.15,25.9 VT3.2 21.35,25.9 21,26.25 21,29.9 ; R14.2@24.15,29.9 VT4.2 21,29.9 ; R29.2@24.15,33.9 VT8.2 21,33.9 ; R30.2@24.15,37.9 VT9.2 21,37.9 ; 21,29.9 21,33.9 ; 21,33.9 21,37.9
  Bottom Layer w0.3: R53.1 10.25,45.25 18,45.25 v1(19.8,47.05) 21.75,45.1 21.75,40.75 v1(19.95,38.95)
HV2: R50.2 R51.2 R53.2 VT13.2 VT14.2 | length 27.7
  Top Layer w0.3: R50.2@24.15,41.9 VT13.2 21.35,41.9 v1(20.25,43) 21,43.75 21,45.5 21.4,45.9 VT14.2 R51.2@24.15,45.9
  Bottom Layer w0.3: R53.2 11.5,40.15 11.5,43.75 12.25,44.5 18.75,44.5 v1(20.25,43)
HV_A1: VD2.2 X2.1 | length 23.2
  Top Layer w0.3: v1(12.8,23.3) VD2.2
  Bottom Layer w0.3: v1(12.8,23.3) 12.8,13.45 16.25,10 16.25,5 X2.1
HV_A2: VD3.2 X2.2 | length 24.7
  Top Layer w0.3: v1(12.8,27.3) VD3.2
  Bottom Layer w0.3: v1(12.8,27.3) 14,26.1 14,13.5 17.5,10 X2.2
HV_A3: VD6.2 X2.3 | length 32.2
  Top Layer w0.3: v1(12.8,31.3) VD6.2
  Bottom Layer w0.3: v1(12.8,31.3) 14.75,29.35 14.75,14 18.75,10 18.75,5.04 X2.3
HV_A4: VD7.2 X2.4 | length 33.7
  Top Layer w0.3: v1(12.8,35.3) VD7.2
  Bottom Layer w0.3: v1(12.8,35.3) 15.5,32.6 15.5,14.5 20.04,9.96 X2.4
HV_A5: VD9.2 X2.5 | length 41.3
  Top Layer w0.3: v1(12.8,39.25) VD9.2
  Bottom Layer w0.3: v1(12.8,39.25) 16.25,35.8 16.25,15 21.3,9.95 21.3,5.03 X2.5
HV_A6: VD10.2 X2.6 | length 42.8
  Top Layer w0.3: v1(12.8,43.25) VD10.2
  Bottom Layer w0.3: v1(12.8,43.25) 17,39.05 17,15.5 22.58,9.92 X2.6
HV_C0: VT17.3 X2.7 | length 16.5
  Top Layer w0.3: VT17.3 18.45,12.8 20.5,10.75 23.5,10.75 26.4,7.85 26.4,5.07 X2.7@25.08,3.75
HV_C1: VT18.3 X2.8 | length 15.8
  Top Layer w0.3: VT18.3 13.7,12.8 15.25,11.25 18.5,11.25 20,9.75 23,9.75 25.08,7.67 X2.8@25.08,6.29
HV_C2: VT19.3 X2.9 | length 12.1
  Top Layer w0.3: VT19.3 24.95,12.8 28.9,8.85 28.9,5.03 X2.9@27.62,3.75
HV_C3: VT20.3 X2.10 | length 11.1
  Top Layer w0.3: VT20.3 20.35,12.75 21.25,12.75 22.5,11.5 24.25,11.5 27.665,8.085 X2.10@27.665,6.335
HV_C4: VT21.3 X2.11 | length 9.6
  Top Layer w0.3: X2.11@30.16,3.75 31.55,5.14 VT21.3
HV_C5: VT22.3 X2.12 | length 8
  Top Layer w0.3: VT22.3 28.7,12.8 30.16,11.34 X2.12@30.16,6.29
HV_C6: VT23.3 X2.13 | length 12.3
  Top Layer w0.3: X2.13@32.7,3.75 34,5.05 34,8.75 38.05,12.8 VT23.3
HV_C7: VT25.3 X2.14 | length 8.2
  Top Layer w0.3: X2.14@32.7,6.29 32.7,11.2 34.3,12.8 VT25.3
HV_C8: VT26.3 X2.15 | length 15.1
  Top Layer w0.3: X2.15@35.24,3.75 41.99,10.5 43.25,10.5 45.55,12.8 VT26.3
HV_C9: VT27.3 X2.16 | length 10.2
  Top Layer w0.3: X2.16@35.265,6.265 41.8,12.8 VT27.3
HV_I1: R89.2 VT29.3 | length 2.2
  Top Layer w0.3: VT29.3 R89.2@39.7,85.55
HV_I2: R70.2 VT30.3 | length 2.2
  Top Layer w0.3: VT30.3 R70.2@39.7,81.55
HV_I3: R90.2 VT31.3 | length 2.2
  Top Layer w0.3: VT31.3 R90.2@39.7,77.55
HV_Point: R28.1 R33.1 R35.1 R41.1 VT28.3 | length 46.1
  Top Layer w0.3: R35.1 R41.1 R33.1 v1(7.75,29.25) R28.1 ; VT28.3 v1(19.8,53.95)
  Bottom Layer w0.3: v1(7.75,29.25) 6.75,30.25 6.75,44.75 8.25,46.25 17,46.25 21.25,50.5 21.25,52.5 v1(19.8,53.95)
I1: DD1.33 R82.1 | length 32.9
  Top Layer w0.25: v1(23.5,62) 23.5,61 25.05,59.45 26.186,59.45 26.636,59 DD1.33
  Top Layer w0.3: v1(29.25,84.5) R82.1
  Bottom Layer w0.3: v1(23.5,62) 23.4,62.1 23.4,66.4 28.75,71.75 28.75,79.5 28.35,79.9 28.35,83.6 v1(29.25,84.5)
I2: DD1.32 R84.1 | length 29.4
  Top Layer w0.25: v1(24.75,61.25) 24.75,60.386 25.236,59.9 26.373,59.9 26.773,59.5 DD1.32
  Top Layer w0.3: v1(29.25,81.5) 30.5,81.5 30.75,81.25 R84.1
  Bottom Layer w0.3: v1(24.75,61.25) 24.75,62.25 23.9,63.1 23.9,66.064 29.25,71.414 v1(29.25,81.5)
I3: DD1.31 R86.1 | length 21
  Top Layer w0.25: v1(26.075,60.834) 26.909,60 DD1.31
  Top Layer w0.3: v1(30.75,75.25) R86.1
  Bottom Layer w0.3: v1(26.075,60.834) 26.075,61.75 24.4,63.425 24.4,65.857 29.75,71.207 29.75,74.25 v1(30.75,75.25)
Menu: C2.2 DD1.27 R5.2 R7.1 | length 90
  Top Layer w0.25: v1(25.3,65.2) 24.9,64.8 24.9,63.062 25.962,62 DD1.27 ; R7.1 v1(32.75,73.5)
  Top Layer w0.3: 47.5,48.25 v1(47.5,49) C2.2
  Bottom Layer w0.3: v1(25.3,65.2) 25.3,66.05 v1(32.75,73.5) 35.25,76 35.25,84.207 41.043,90 45.207,90 47.2,88.007 47.2,84.657 46.25,83.707 46.25,81.414 47,80.664 47,74 43.2,70.2 43.2,53.3 v1(47.5,49)
Menu_btn: R5.1 X9.8 | length 12.3
  Top Layer w0.3: X9.8 44.94,38.1 47.35,38.1 48,38.75 48,43 47.5,43.5 R5.1
NetBF1_2: BF1.2 VT24.3 | length 11.8
  Top Layer w0.3: v1(26.3,85.45) VT24.3
  Bottom Layer w0.3: v1(26.3,85.45) 30.85,85.45 BF1.2
NetC5_2: C5.2 DA1.3 | length 2.9
  Top Layer w0.3: DA1.3 20.79,82.54 C5.2
NetC10_2: C10.2 DD1.3 ZQ1.1 | length 13.6
  Top Layer w0.25: DD1.3 43.25,58.5 ZQ1.1
  Top Layer w0.3: ZQ1.1 45,58.5 45.75,57.75 C10.2 C10.2@45.5,56.5
NetC12_2: C12.2 DD1.1 pad.1 | length 69.1
  Top Layer w0.25: DD1.1 37.25,57.5 37.75,58 43,58 43.5,57.5 C12.2 ; v1(37.5,55.25) 38,55.75 43.25,55.75 43.5,56 C12.2 ; C12.2@43.25,56.5 C12.2
  Top Layer w0.3: pad.1@44.75,77.5 pad.1@44.75,87.5
  Bottom Layer w0.3: v1(37.5,55.25) 37.5,56 37.75,56.25 37.75,84.043 38.957,85.25 43.293,85.25 44.75,83.793 pad.1@44.75,77.5
NetC13_2: C13.2 DD1.4 ZQ1.2 | length 17.3
  Top Layer w0.25: DD1.4 42.5,59 43.25,59.75 43.25,60.75 44.25,61.75 46,61.75 ZQ1.2
  Top Layer w0.3: ZQ1.2 47.5,58.25 48,57.75 C13.2
NetC16_2: C16.2 DD1.7 R69.2 | length 15.3
  Top Layer w0.25: DD1.7 37.273,60.5 38.5,61.727 38.5,67.364 39,67.864 39,70 38.25,70.75 R69.2 C16.2
NetC19_2: C19.2 DD1.6 ZQ2.1 | length 19
  Top Layer w0.25: DD1.6 38,60 39.5,61.5 39.5,67 41.25,68.75 ZQ2.1@41.25,71.25
  Top Layer w0.3: ZQ2.1@41.25,73.75 43.5,73.75 44.5,74.75 C19.2
NetC20_2: C20.2 DD1.5 ZQ2.2 | length 17.2
  Top Layer w0.25: DD1.5 38.25,59.5 39.25,60.5 ZQ2.2@41.25,60.5
  Top Layer w0.3: ZQ2.2 41.25,66.75 45.5,71 C20.2
NetDA1_1: DA1.1 DA1.7 DA1.8 L1.4 R6.2 R8.2 | length 23.6
  Top Layer w0.3: R8.2 DA1.8 15.5,80 ; DA1.7 14.98,81.27 15.5,80.75 15.5,80 ; DA1.1 15.5,80
  Top Layer w1: R6.2 3.5,78 L1.4 9.75,76.5 11.5,78.25 R8.2
NetDA1_2: DA1.2 R18.1 | length 2.5
  Top Layer w0.3: DA1.2 R18.1@21.73,81.27
NetDA1_5: DA1.5 R9.2 R12.1 | length 7.6
  Top Layer w0.3: R9.2 R12.1 10,83 10.81,83.81 DA1.5
NetDD1_44: DD1.44 R54.2 | length 11.1
  Top Layer w0.25: DD1.44 32.75,56.75 33.25,57.25 35,57.25 35.47,56.78 37.22,56.78 37.775,57.335 37.99,57.55 41.2,57.55 41.25,57.5 R54.2 R54.2@41,56.5
NetL1_1: L1.1 VD8.1 VT10.2 | length 20
  Top Layer w1: L1.1 5.25,67.5 7.95,64.8 VD8.1 10,61.45 10,56.25 13.75,52.5 VT10.2
NetR1_2: R1.2 R2.2 VT1.1 | length 4.4
  Top Layer w0.3: VT1.1 R2.2 R1.2
NetR3_2: R3.2 R4.2 VT2.1 | length 4.4
  Top Layer w0.3: VT2.1 R4.2 R3.2
NetR10_1: R10.1 VT1.3 | length 2
  Top Layer w0.3: R10.1@29.55,24.95 VT1.3
NetR10_2: R10.2 R13.1 VT3.1 | length 5.1
  Top Layer w0.3: VT3.1@22.1,24 VT3.1 R13.1 25.25,24 25.5,24.25 25.5,24.75 25.75,25 R10.2@26.5,25
NetR11_1: R11.1 VT2.3 | length 2
  Top Layer w0.3: R11.1@29.55,28.95 VT2.3
NetR11_2: R11.2 R14.1 VT4.1 | length 5.1
  Top Layer w0.3: VT4.1@22.1,28 VT4.1 R14.1 25.25,28 25.5,28.25 25.5,28.75 25.75,29 R11.2
NetR12_2: R12.2 R16.1 | length 6.6
  Top Layer w0.3: R16.1 7.5,85 R12.2
NetR18_2: R18.2 R24.2 VD4.1 VT7.1 | length 27
  Top Layer w0.3: VD4.1 14.125,63.875 14.75,63.25 VT7.1 16.5,63.25 17,63.75 R24.2 17,68.25 18.9,70.15 18.9,76.9 21.5,79.5 24.25,79.5 24.75,80 R18.2
NetR20_2: R20.2 R21.2 VT5.1 | length 4.4
  Top Layer w0.3: VT5.1 R21.2 R20.2
NetR22_2: R22.2 R23.2 VT6.1 | length 4.4
  Top Layer w0.3: VT6.1 R23.2 R22.2
NetR26_1: R26.1 VT5.3 | length 2
  Top Layer w0.3: R26.1@29.55,32.95 VT5.3
NetR26_2: R26.2 R29.1 VT8.1 | length 5.1
  Top Layer w0.3: VT8.1 R29.1 25.25,32 25.5,32.25 25.5,32.75 25.75,33 R26.2
NetR27_1: R27.1 VT6.3 | length 2
  Top Layer w0.3: R27.1@29.55,36.95 VT6.3
NetR27_2: R27.2 R30.1 VT9.1 | length 5.1
  Top Layer w0.3: VT9.1 R30.1 25.25,36 25.5,36.25 25.5,36.75 25.75,37 R27.2
NetR28_2: R28.2 X5.3 | length 23.7
  Top Layer w0.3: X5.3 7.5,15 9.75,17.25 9.75,33 9,33.75 R28.2
NetR32_1: R32.1 R34.1 X5.1 X6.1 | length 21.8
  Top Layer w0.3: v1(2.25,30) R32.1 R34.1
  Bottom Layer w0.3: v1(2.25,30) 2.25,20.17 X6.1 X5.1
NetR33_2: R33.2 X5.2 | length 14.7
  Top Layer w0.3: X5.2 4.96,14.46 9,18.5 9,21.5 7.75,22.75 R33.2
NetR35_2: R35.2 X6.2 | length 6.1
  Top Layer w0.3: R35.2 2.25,24.25 4.96,21.54 X6.2
NetR37_2: R37.2 R38.2 VT11.1 | length 4.4
  Top Layer w0.3: VT11.1 R38.2 R37.2
NetR39_2: R39.2 R40.2 VT12.1 | length 4.4
  Top Layer w0.3: VT12.1 R39.2
NetR41_2: R41.2 X6.3 | length 6
  Top Layer w0.3: R41.2 5,24 7.5,21.5 X6.3
NetR43_2: R43.2 R48.2 R49.1 VT16.2 | length 24.3
  Top Layer w0.3: v1(20,51) 21.1,49.9 VT16.2 R49.1@24.15,49.9
  Bottom Layer w0.3: R48.2 7.4,48.75 R43.2 11.35,47.5 16.5,47.5 v1(20,51)
NetR44_1: R44.1 VT11.3 | length 2
  Top Layer w0.3: R44.1@29.55,40.95 VT11.3
NetR44_2: R44.2 R50.1 VT13.1 | length 5.1
  Top Layer w0.3: VT13.1 R50.1 25.25,40 25.5,40.25 25.5,40.75 25.75,41 R44.2
NetR45_1: R45.1 VT12.3 | length 2
  Top Layer w0.3: R45.1@29.55,44.95 VT12.3
NetR45_2: R45.2 R51.1 VT14.1 | length 5.1
  Top Layer w0.3: VT14.1 R51.1 25.25,44 25.5,44.25 25.5,44.75 25.75,45 R45.2
NetR46_2: R46.2 R47.2 VT15.1 | length 4.4
  Top Layer w0.3: VT15.1 R47.2 R46.2
NetR49_2: R49.2 R52.2 VT16.1 | length 5.1
  Top Layer w0.3: VT16.1 R49.2 25.25,48 25.5,48.25 25.5,48.75 25.75,49 R52.2
NetR52_1: R52.1 VT15.3 | length 2
  Top Layer w0.3: R52.1@29.55,48.95 VT15.3
NetR55_2: R55.2 R56.2 VT17.1 | length 4.4
  Top Layer w0.3: VT17.1 R56.2 R55.2
NetR57_2: R57.2 R58.2 VT18.1 | length 4.4
  Top Layer w0.3: VT18.1 R58.2 R57.2
NetR59_2: R59.2 R60.2 VT19.1 | length 4.4
  Top Layer w0.3: VT19.1 R60.2 R59.2
NetR61_2: R61.2 R62.2 VT20.1 | length 4.4
  Top Layer w0.3: VT20.1 R62.2 R61.2
NetR63_2: R63.2 R64.2 VT21.1 | length 4.4
  Top Layer w0.3: VT21.1 R64.2 R63.2
NetR65_2: R65.2 R66.2 VT22.1 | length 4.4
  Top Layer w0.3: VT22.1 R66.2 R65.2
NetR67_2: R67.2 R68.2 VT23.1 | length 4.4
  Top Layer w0.3: VT23.1 R67.2
NetR70_1: R70.1 X9.3 | length 57.8
  Top Layer w0.3: v1(41.4,80.1) 42.3,80.1 42.5,80.3 R70.1
  Bottom Layer w0.3: v1(41.4,80.1) 41.35,80.1 40.5,79.25 40.5,32 42,30.5 44.96,30.5 X9.3
NetR71_1: R71.1 R73.1 X9.1 | length 64.7
  Top Layer w0.3: R73.1@11.25,3.75 13.75,3.75 16.25,1.25 36.25,1.25 v1(38.75,3.75) ; R71.1 X9.1
  Bottom Layer w0.3: v1(38.75,3.75) 38.75,6.25 46.25,13.75 X9.1
NetR72_2: R72.2 R88.2 VT24.1 | length 5.7
  Top Layer w0.3: R72.2 R88.2 VT24.1
NetR74_2: R74.2 R75.2 VT25.1 | length 4.4
  Top Layer w0.3: VT25.1 R75.2 R74.2
NetR76_2: R76.2 R77.2 VT26.1 | length 4.4
  Top Layer w0.3: VT26.1 R76.2
NetR78_2: R78.2 R79.2 VT27.1 | length 4.4
  Top Layer w0.3: VT27.1 R78.2
NetR80_2: R80.2 R81.2 VT28.1 | length 4.4
  Top Layer w0.3: VT28.1 R81.2 R80.2
NetR82_2: R82.2 R83.2 VT29.1 | length 4.4
  Top Layer w0.3: R82.2 R83.2 VT29.1
NetR84_2: R84.2 R85.2 VT30.1 | length 4.4
  Top Layer w0.3: R84.2 R85.2 VT30.1
NetR86_2: R86.2 R87.2 VT31.1 | length 4.4
  Top Layer w0.3: R86.2 R87.2 VT31.1
NetR89_1: R89.1 X9.2 | length 60.9
  Top Layer w0.3: v1(41,83.75) 42,83.75 42.5,84.25 42.5,85.25 R89.1@42.75,85.5
  Bottom Layer w0.3: v1(41,83.75) 39.75,82.5 39.75,31.25 41.75,29.25 X9.2
NetR90_1: R90.1 X9.4 | length 51.5
  Top Layer w0.3: v1(42.5,79.1) 42.5,77.95 42.4,77.85 R90.1@42.75,77.5
  Bottom Layer w0.3: v1(42.5,79.1) 41.25,77.85 41.25,32.75 42.21,31.79 X9.4
NetVD1_2: VD1.2 X1.1 | length 3.4
  Top Layer w1: X1.1 23.5,94.75 VD1.2
NetVD1_3: VD1.3 X3.1 | length 2.7
  Top Layer w1: VD1.3 X3.1@27.29,97.46
NetVD2_1: VD2.1 VT3.3 | length 2.5
  Top Layer w0.3: VD2.1@17.25,24.95 VT3.3@19.8,24.95
NetVD3_1: VD3.1 VT4.3 | length 2.5
  Top Layer w0.3: VD3.1@17.25,28.95 VT4.3@19.8,28.95
NetVD4_2: VD4.2 VD5.2 VT7.2 VT10.1 | length 10
  Top Layer w0.3: VD4.2 12.75,59.25 13.25,58.75 VD5.2 ; VT10.1 15,58.625 VD5.2 ; VT7.2 15.65,60.65 15.125,60.125 VD5.2
NetVD6_1: VD6.1 VT8.3 | length 2.5
  Top Layer w0.3: VD6.1@17.25,32.95 VT8.3
NetVD7_1: VD7.1 VT9.3 | length 2.5
  Top Layer w0.3: VD7.1@17.25,36.95 VT9.3
NetVD9_1: VD9.1 VT13.3 | length 2.5
  Top Layer w0.3: VD9.1@17.25,40.95 VT13.3
NetVD10_1: VD10.1 VT14.3 | length 2.5
  Top Layer w0.3: VD10.1@17.25,44.95 VT14.3
Photo: C9.2 DD1.19 R31.1 X9.7 | length 98.4
  Top Layer w0.25: v1(30.8,73.5) 30.8,68.7 R31.1 31,67.7 31.325,67.375 31.625,67.375 32.125,66.875 32.125,66.125 31.75,65.75 DD1.19
  Top Layer w0.3: v1(32.5,74.75) C9.2
  Bottom Layer w0.3: v1(30.8,73.5) 31.25,73.5 v1(32.5,74.75) 34.75,77 34.75,84.414 40.836,90.5 45.414,90.5 47.7,88.214 47.7,84.45 46.75,83.5 46.75,81.621 47.5,80.871 47.5,73.75 43.7,69.95 43.7,54.3 48.5,49.5 48.5,39.12 X9.7
Point: DD1.20 R80.1 | length 19.7
  Top Layer w0.25: DD1.20 31.25,65.75 v1(31.25,66.5)
  Top Layer w0.3: R80.1 28,54 v1(28.5,54.5)
  Bottom Layer w0.3: v1(28.5,54.5) 30.25,56.25 30.25,58.043 29.859,58.434 28.727,58.434 28.2,58.962 28.2,63.45 v1(31.25,66.5)
Power_mode: DD1.38 R46.1 | length 13.2
  Top Layer w0.25: DD1.38 29.75,53 31.75,51 38,51 38.25,50.75 R46.1
RX: DD1.22 R36.1 X7.3 | length 12
  Top Layer w0.25: X7.3 24.21,71.29 25.5,70 R36.1 27.136,70 29,68.136 29,66.636 30.25,65.386 DD1.22
Set: C3.2 DD1.26 R15.2 R17.1 | length 89.8
  Top Layer w0.25: v1@25.95,63.25 v1(26,63.2) 26.7,62.5 DD1.26
  Top Layer w0.3: R15.2 v1(45.25,49) C3.2 C3.2@45.25,50.5 ; R17.1 45.5,89 46.2,88.3 v1(46.2,86)
  Bottom Layer w0.3: v1(26,63.2) 26,64.4 26.5,64.9 26.5,65.957 35.75,75.207 35.75,84 41.25,89.5 45,89.5 46.2,88.3 v1(46.2,86) 46.2,84.364 45.75,83.914 45.75,81.207 46.5,80.457 46.5,74.225 42.7,70.425 42.7,51.55 v1(45.25,49)
Set_btn: R15.1 X9.9 | length 7
  Top Layer w0.3: R15.1@45.25,46 R15.1 45.25,43.75 46.25,42.75 X9.9
SWCLK: DD1.37 X8.3 | length 11.4
  Top Layer w0.25: X8.3 23,57.67 23,55.75 23.75,55 27.25,55 28.25,56 DD1.37
SWDIO: DD1.34 X8.1 | length 10.1
  Top Layer w0.25: X8.1 22.5,63.25 22.5,61.346 24.846,59 26,59 26.5,58.5 DD1.34
TX: DD1.21 R42.1 X7.2 | length 18.3
  Top Layer w0.25: X7.2 24.53,73.83 25.2,74.5 28.25,74.5 30,72.75 30,70.25 29.75,70 R42.1 29,69 29.5,68.5 29.5,66.773 30.75,65.523 DD1.21
pads on no net: DD1.2 DD1.28 DD1.46 L1.2 L1.3

## Keep-outs
Keep-Out Layer:
  the board outline again, w0.2

## Silkscreen, mask and mechanical layers (free items; w line width, h text height)
Top Overlay:
  lines w0.2: 2.423,50.7 2.423,50.5 ; 2.623,50.6 2.423,50.5 ; 2.823,51.7 2.223,51 2.923,51.2 2.423,50.5 ; 39.943,51.8 39.943,51.6 ; 40.143,51.7 39.943,51.6 ; 40.343,52.8 39.743,52.1 40.443,52.3 39.943,51.6 ; 43.25,74 43.25,89 49.5,89 ; 43.25,76 47.5,76 ; 49,94 49.5,94 ; 1.18,50.1 2.68,52.6 4.18,50.1 1.18,50.1 ; 38.7,51.2 41.7,51.2 40.2,53.7 38.7,51.2
  text "12VAC" at 21.6,98.4 h1
  text "GB1" at 46.9,81.3 h1 r90
  text "GPS" at 19.5,75 h1 r90
  text "SWD" at 22.8,63.4 h1
  text "AL" at 23.3,58.9 h1.5
  text "NIXIE / CLOCKS" at 30.4,52.3 h1
  text "Points" at 10.3,13.5 h1 r90
  text "Tubes" at 41,9 h1
Bottom Overlay:
  drawing of 70 lines, arcs and shapes, not listed
  text "ATTENTION!" at 28.5,81.9 h1.52
  text "HIGH VOLTAGE over all board!" at 41.4,78.8 h1.52
  text "open source" at 42.9,59 h3
  text "hardware" at 40.232,57.186 h3.2
  text "28.02.2018" at 39.4,50.2 h1.52
  text "https://github.com/ / AntaresLab/Nixie_clocks" at 47.5,44 h1.52
  text "Nixie clocks" at 37.4,21.9 h1.52
  text "AntaresLab" at 48.5,12 h8